# Allegro board ReedPSoC2.brd
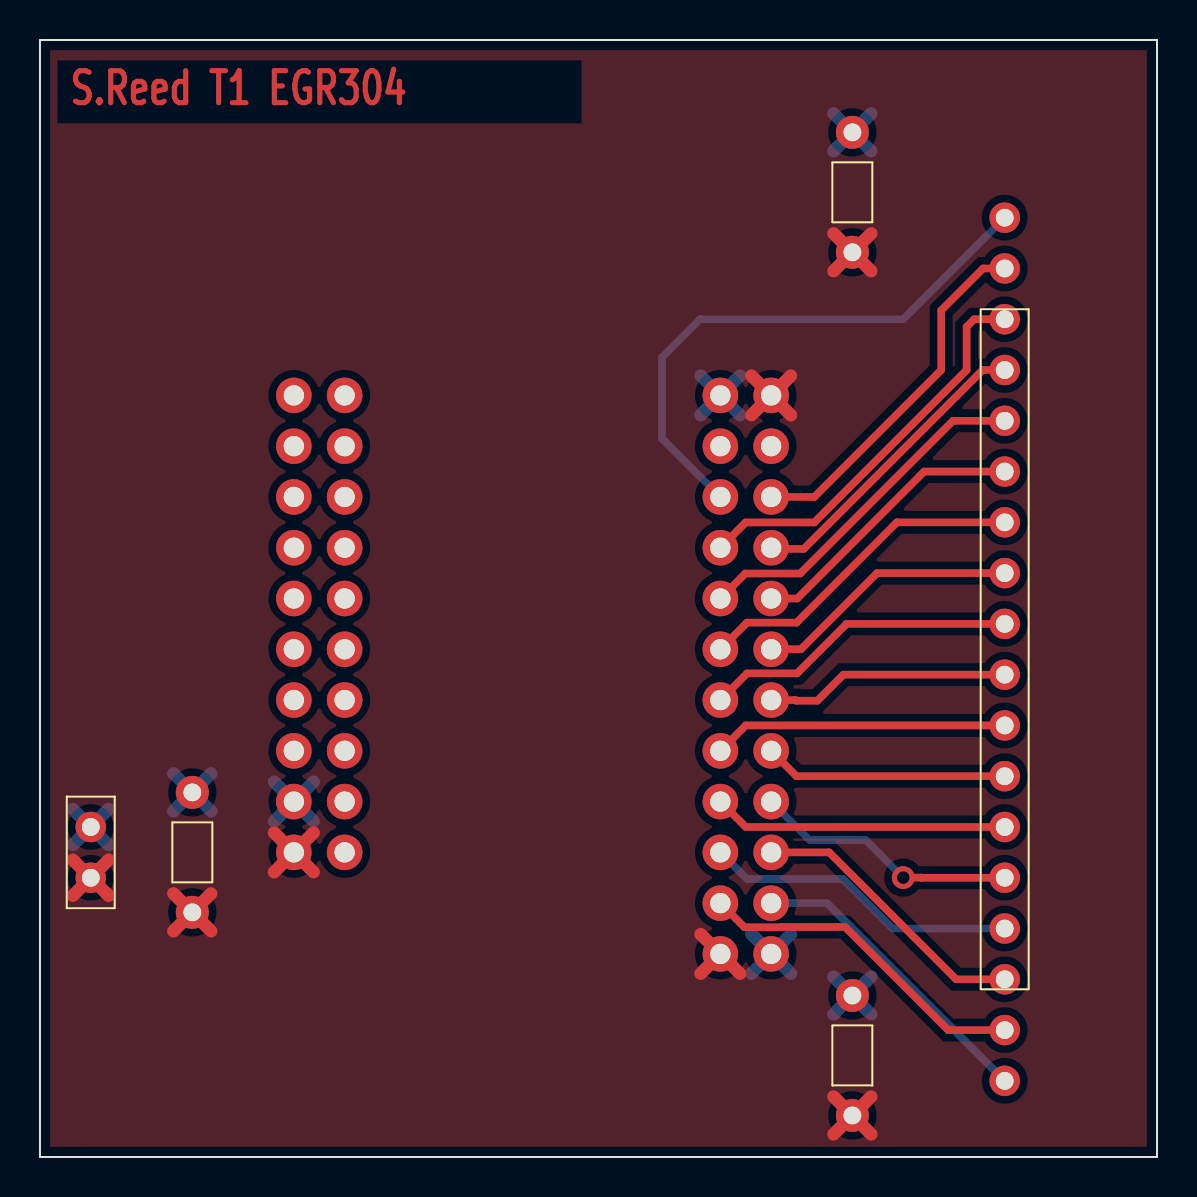
[diagram p0: board, top side]
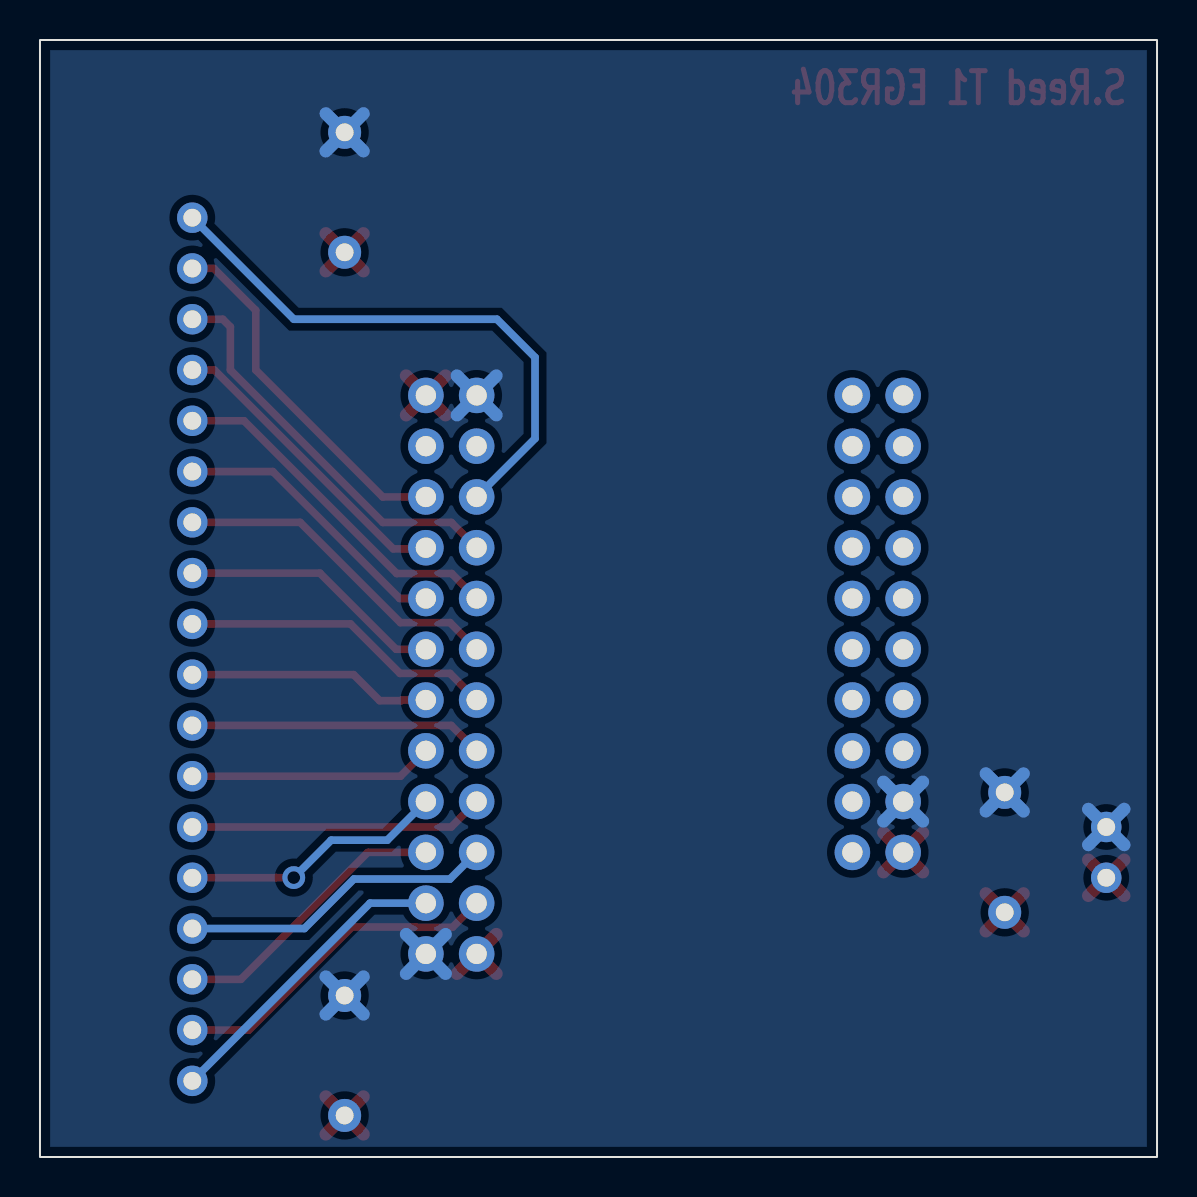
[diagram p1: board, bottom side, seen from below]

Outline 55.88 x 55.88 mm; copper layers: TOP, BOTTOM. Coordinates in mm from the lower left corner of the outline.
Outline path: rectangle 0,0 55.88,55.88

## Placement (name value [footprint] x y rotation side)
C1  0.1uF 5V  [CAP1]  7.62 15.24 90 top
C2  0.1 uF 5V  [CAP1]  40.64 5.08 90 top
C3  0.1uF 5V  [CAP1]  40.64 48.26 90 top
J1  CON2  [HEADER2]  2.54 15.24 0 top
J2  HEADER 18  [HEADER18]  48.26 25.4 0 top
U1  PSoC4BLE  [PSOC4BLE]  12.7 38.1 0 top

## Library data of the parts
C1-C3 = CAP NP
J1 = CON2
J2 = HEADER 18
U1 = PSoC4BLE_0

## Footprints (pads in the part's own frame, mm; a bottom-side part is the same pattern mirrored in y, then rotated)
CAP1
  round 1.651 hole 0.889: 1(-3,0) 2(3,0)
HEADER2
  round 1.524 hole 0.889: 1(0,1.27) 2(0,-1.27)
HEADER18
  round 1.524 hole 0.889: 1(0,21.59) 2(0,19.05) 3(0,16.51) 4(0,13.97) 5(0,11.43) 6(0,8.89) 7(0,6.35) 8(0,3.81) 9(0,1.27) 10(0,-1.27) 11(0,-3.81) 12(0,-6.35) 13(0,-8.89) 14(0,-11.43) 15(0,-13.97) 16(0,-16.51) 17(0,-19.05) 18(0,-21.59)
PSOC4BLE
  round 1.778 hole 1.016: 1(2.54,-22.86) 2(0,-22.86) 3(2.54,-20.32) 4(0,-20.32) 5(2.54,-17.78) 6(0,-17.78) 7(2.54,-15.24) 8(0,-15.24) 9(2.54,-12.7) 10(0,-12.7) 11(2.54,-10.16) 12(0,-10.16) 13(2.54,-7.62) 14(0,-7.62) 15(2.54,-5.08) 16(0,-5.08) 17(2.54,-2.54) 18(0,-2.54) 19(2.54,0) 20(0,0) 21(21.336,0) 22(23.876,0) 23(21.336,-2.54) 24(23.876,-2.54) 25(21.336,-5.08) 26(23.876,-5.08) 27(21.336,-7.62) 28(23.876,-7.62) 29(21.336,-10.16) 30(23.876,-10.16) 31(21.336,-12.7) 32(23.876,-12.7) 33(21.336,-15.24) 34(23.876,-15.24) 35(21.336,-17.78) 36(23.876,-17.78) 37(21.336,-20.32) 38(23.876,-20.32) 39(21.336,-22.86) 40(23.876,-22.86) 41(21.336,-25.4) 42(23.876,-25.4) 43(21.336,-27.94) 44(23.876,-27.94)

## Nets
GND: C1.2 C2.2 C3.2 J1.1 U1.4(GND1) U1.21(GND2) U1.44(GND3)
+5 V: C1.1 C2.1 C3.1 J1.2 U1.2(VDDD) U1.22(VDDA) U1.43(VDDR)
N01189: J2.18 U1.42(P2.1)
N01202: J2.17 U1.41(P2.0)
N01206: J2.16 U1.40(P2.3)
N01210: J2.15 U1.39(P2.2)
N01223: J2.14 U1.38(P2.5)
N01227: J2.13 U1.37(P2.4)
N01231: J2.12 U1.36(P2.7)
N01235: J2.11 U1.35(P2.6)
N01243: J2.10 U1.34(P5.0)
N01251: J2.9 U1.33(P4.1)
N01259: J2.8 U1.32(P5.1)
N01267: J2.7 U1.31(P4.0)
N01275: J2.6 U1.30(P3.1)
N01283: J2.5 U1.29(P3.0)
N01459: J2.4 U1.28(P3.3)
N01463: J2.3 U1.27(P3.2)
N01471: J2.2 U1.26(P3.5)
N01479: J2.1 U1.25(P3.4)

Pads without a net: U1 1 3 5 6 7 8 9 10 11 12 13 14 15 16 17 18 19 20 23 24

## Via types
v1: diameter 1.143, hole 0.635, TOP to BOTTOM, 1 via

## Routing (per net, layer and track width the routed paths; a pad name or vN(x,y) marks a point on that pad's centre or on a via; arc(x,y) is an arc through that point)
GND: length 37.7
  BOTTOM w0.635: 11.71,16.79 U1.4 ; U1.4 13.69,18.77 ; U1.4 11.71,18.77 ; U1.4 13.69,16.79 ; C1.2 8.56,19.18 ; C1.2 6.68,17.3 ; C1.2 8.56,17.3 ; C1.2 6.68,19.18 ; 39.7,9.02 C2.2 ; C2.2 41.58,7.14 ; C2.2 41.58,9.02 ; C2.2 39.7,7.14 ; 1.64,17.41 J1.1 ; J1.1 3.44,17.41 ; J1.1 1.64,15.61 ; J1.1 3.44,15.61 ; 33.05,37.11 U1.21 ; U1.21 35.02,37.11 ; U1.21 35.02,39.09 ; U1.21 33.05,39.09 ; 35.59,9.17 U1.44 ; U1.44 37.56,11.15 ; U1.44 35.59,11.15 ; U1.44 37.56,9.17 ; C3.2 41.58,52.2 ; C3.2 39.7,52.2 ; C3.2 39.7,50.32 ; C3.2 41.58,50.32
+5 V: length 36.3
  TOP w0.635: J1.2 3.44,13.07 ; J1.2 1.64,13.07 ; J1.2 1.64,14.87 ; J1.2 3.44,14.87 ; U1.22 37.56,39.09 ; U1.22 37.56,37.11 ; U1.22 35.59,37.11 ; U1.22 35.59,39.09 ; C2.1 41.58,3.02 ; C2.1 39.7,1.14 ; C2.1 41.58,1.14 ; C2.1 39.7,3.02 ; 11.71,16.23 U1.2 ; U1.2 13.69,16.23 ; U1.2 11.71,14.25 ; U1.2 13.69,14.25 ; 6.68,11.3 C1.1 ; C1.1 6.68,13.18 ; C1.1 8.56,11.3 ; C1.1 8.56,13.18 ; 33.05,11.15 U1.43 ; U1.43 35.02,9.17 ; U1.43 33.05,9.17 ; C3.1 41.58,44.32 ; C3.1 41.58,46.2 ; C3.1 39.7,44.32 ; C3.1 39.7,46.2
N01189: length 15.4
  BOTTOM w0.381: J2.18 39.37,12.7 U1.42
N01202: length 16.9
  TOP w0.381: J2.17 45.43,6.35 40.27,11.51 37.09,11.51 37.08,11.49 35.24,11.49 U1.41
N01206: length 14.3
  TOP w0.381: U1.40 39.48,15.24 45.83,8.89 J2.16
N01210: length 15.8
  BOTTOM w0.381: U1.39 35.37,13.91 40.18,13.91 42.65,11.43 J2.15
N01223: length 13.3
  TOP w0.381: J2.14 44.08,13.97 44.07,13.98 v1(43.19,13.98)
  BOTTOM w0.381: U1.38 38.51,15.85 41.31,15.85 v1(43.19,13.98)
N01227: length 14.8
  TOP w0.381: J2.13 35.31,16.51 U1.37
N01231: length 12.2
  TOP w0.381: J2.12 37.85,19.05 U1.36
N01235: length 14.8
  TOP w0.381: U1.35 35.31,21.59 J2.11
N01243: length 12.2
  TOP w0.381: J2.10 40.19,24.13 38.89,22.83 37.82,22.83 37.78,22.86 U1.34
N01251: length 15.8
  TOP w0.381: U1.33 35.37,24.19 37.87,24.19 40.35,26.67 J2.9
N01259: length 13.3
  TOP w0.381: U1.32 38.06,25.4 41.87,29.21 J2.8
N01267: length 16.9
  TOP w0.381: U1.31 35.37,26.73 37.85,26.73 42.87,31.75 J2.7
N01275: length 14.3
  TOP w0.381: J2.6 44.23,34.29 37.88,27.94 U1.30
N01283: length 17.9
  TOP w0.381: U1.29 35.29,29.19 38.03,29.19 45.67,36.83 J2.5
N01459: length 15.4
  TOP w0.381: U1.28 36.63,30.42 38.21,30.42 47.16,39.37 J2.4
N01463: length 20.2
  TOP w0.381: U1.27 35.3,31.74 38.73,31.74 46.35,39.37 46.35,41.53 46.74,41.91 J2.3
N01471: length 18.2
  TOP w0.381: U1.26 38.73,33.02 45.08,39.37 45.08,42.35 47.18,44.45 J2.2
N01479: length 28.2
  BOTTOM w0.381: U1.25 31.11,35.94 31.11,40 33.02,41.91 43.18,41.91 J2.1

## Copper pours and planes (outline as drawn; the poured copper is in the pictures)
GND on BOTTOM: 0.51,0.51 0.51,55.37 55.37,55.37 55.37,0.51
+5 V on TOP: 0.51,0.51 0.51,55.37 55.37,55.37 55.37,0.51

## Text on the board
TOP: S.Reed T1 EGR304
